# Altium PCB PCB2.PcbDoc
Units mm, origin at the board's own origin, x right, y up, seen from the top; angles counter-clockwise.
Board outline 21.46 x 22.68 mm, 2 copper layers (Top Layer, Bottom Layer), stack 0.88 mm thick; 17 components, 10 nets, 50 pads, 17 vias.
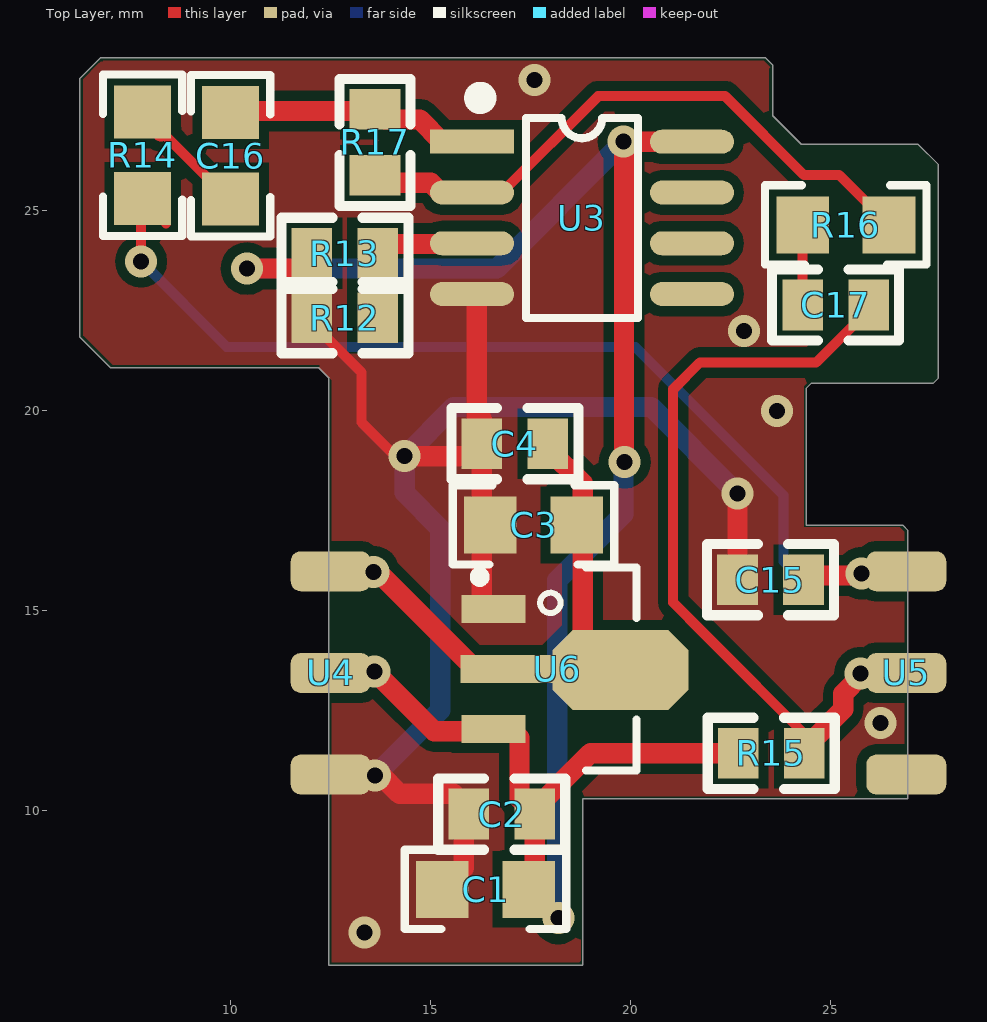
[diagram p0: Top Layer view]
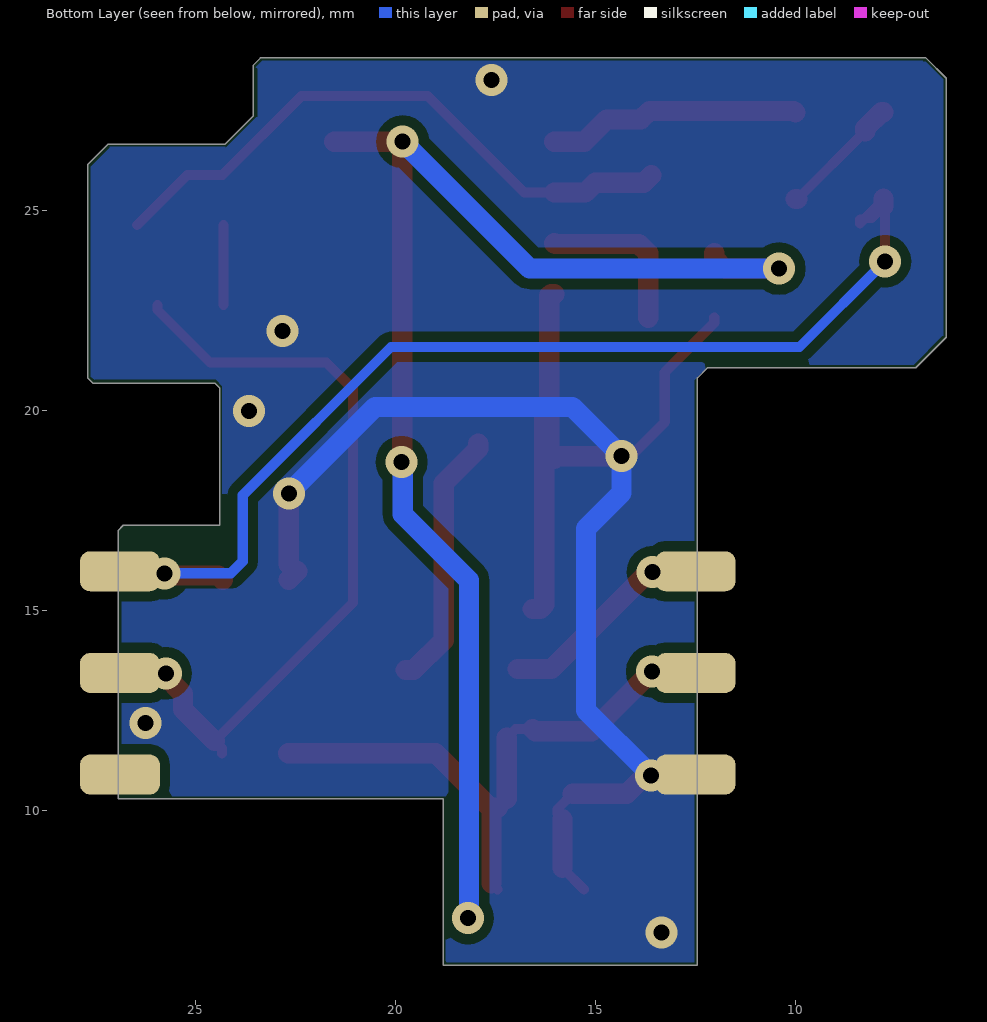
[diagram p1: Bottom Layer view, seen from below]
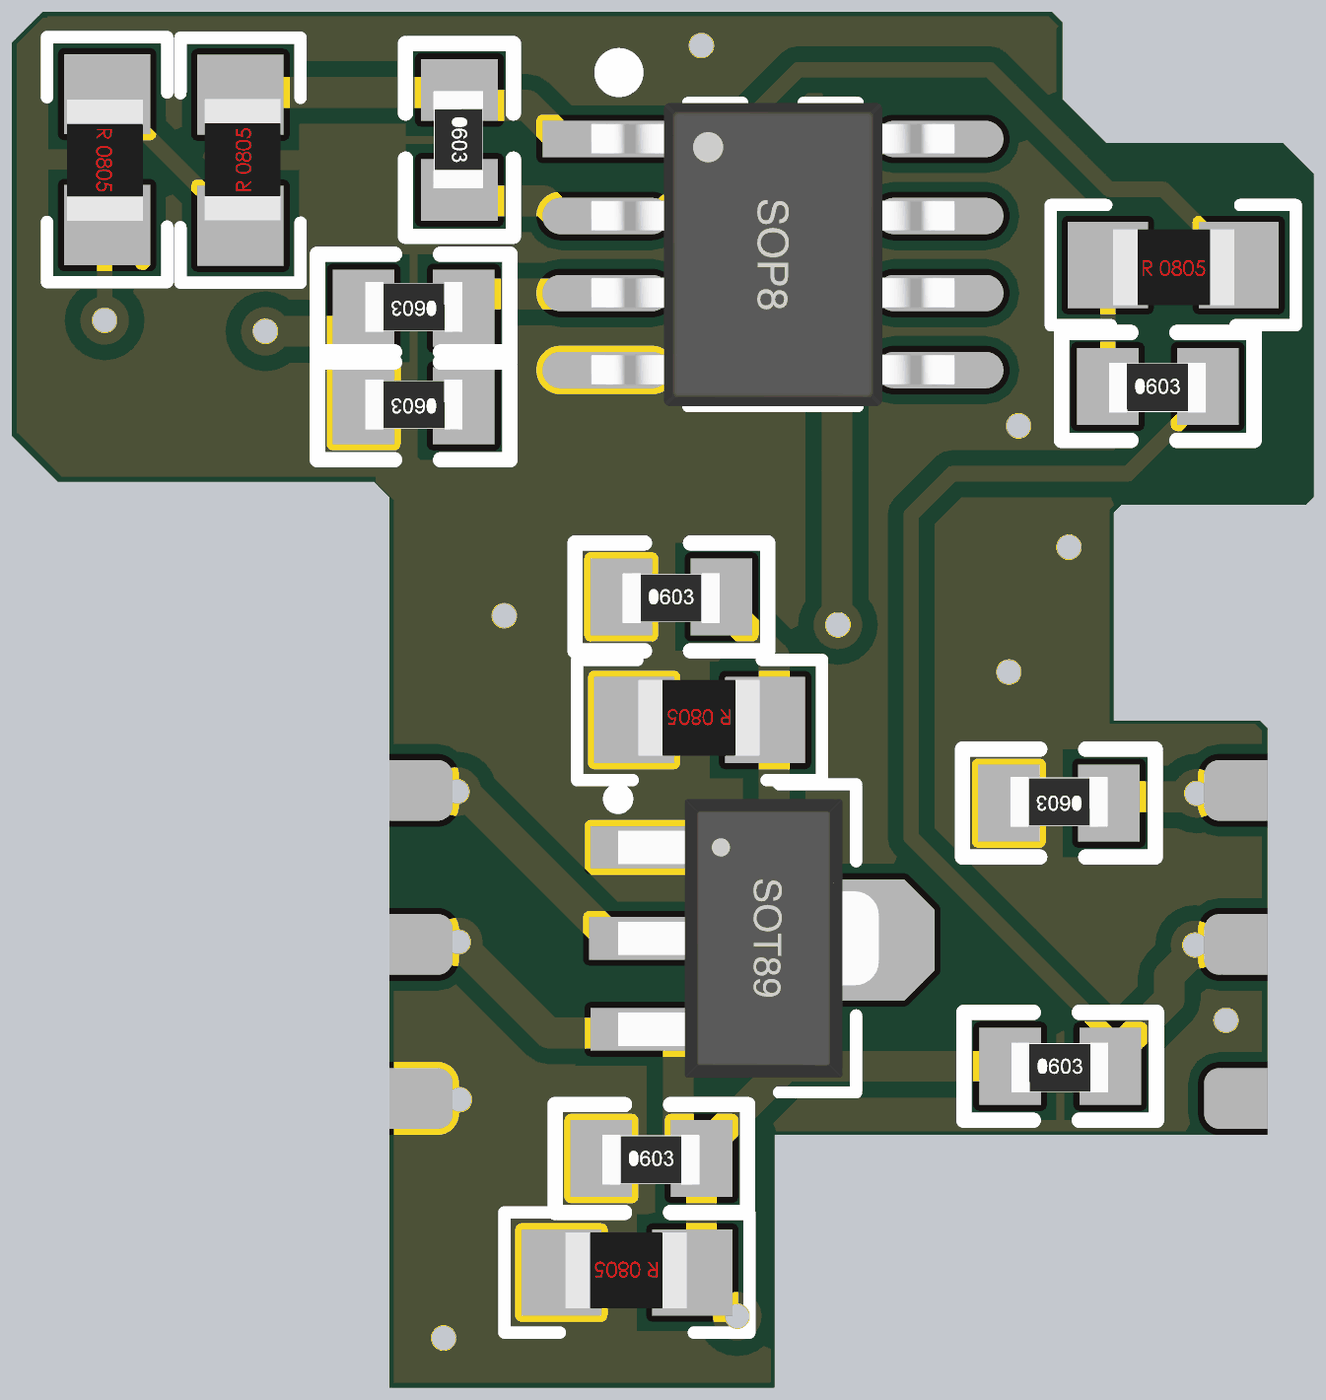
[diagram p2: 3D render of the assembled board from above, using the file's embedded part models]

## Layer stack, top to bottom
Top Solder: solder mask 0.0102, Solder Resist, Dk 3.5
Top Layer: signal copper 0.09
Dielectric 1: dielectric 0.7, FR-4, Dk 4.8
Bottom Layer: signal copper 0.09
Bottom Solder: solder mask 0.0102, Solder Resist, Dk 3.5

## Board outline
12.454,6.143 12.454,20.824 12.2,21.078 6.993,21.078 6.231,21.84 6.231,28.317 6.739,28.825 23.376,28.825 23.554,28.647 23.554,27.377 24.265,26.666 27.186,26.666 27.694,26.158 27.694,20.824 27.567,20.697 24.519,20.697 24.392,20.57 24.392,17.141 26.805,17.141 26.932,17.014 26.932,10.308 18.804,10.308 18.804,6.143

## Design rules (kind name [scope] priority, off if disabled: settings)
Clearance [All] p1: gap=0.254 ignorepadtopadclearanceinfootprint=FALSE except(0: Arc-Hole Track-Hole SMDPad-Hole THPad-Hole Via-Hole Fill-Hole Poly-Hole Region-Hole Text-Hole)
PolygonConnect [All] p1: thpad.connectstyle=Relief thpad.reliefconductorwidth=0.254 thpad.reliefentries=4 thpad.polygonreliefangle="90 Angle" thpad.airgapwidth=0.254 smdpad.connectstyle=Direct smdpad.reliefconductorwidth=0.254 smdpad.reliefentries=4 smdpad.polygonreliefangle="90 Angle" smdpad.airgapwidth=0.254 via.connectstyle=Direct via.reliefconductorwidth=0.254 via.reliefentries=4 via.polygonreliefangle="90 Angle" via.airgapwidth=0.254
RoutingVias [All] p1: holewidth=0.711 width=1.27 viastyle="Through Hole" minholewidth=0.3 minwidth=0.8 maxholewidth=0.711 maxwidth=1.27
SolderMaskExpansion [All] p1: expansion=0.102
Width [All] p1: maxlimit=1.27 minlimit=0.254 preferedwidth=0.254
30 further rules are at their usual default settings.

## Components (designator, comment, footprint, x,y, rotation, side; value= is the part's Value field where it differs from the comment)
C1 "10uF" RC0805 17.45,8.04 r180 top
C2 "104" RC0603 15.95,9.92 r0 top
C3 "10uF" RC0805 18.65,17.15 r180 top
C4 "104" RC0603 16.279,19.18 r0 top
C15 "104" RC0603 24.32,15.78 r180 top
C16 "4.7uf" RC0805 10,25.3 r90 top
C17 "104" RC0603 24.299,22.65 r0 top
R12 "10K" RC0603 13.681,22.33 r180 top
R13 "10K" RC0603 13.681,23.94 r180 top
R14 "300" RC0805 7.8,27.47 r270 top
R15 "10K" RC0603 22.69,11.44 r0 top
R16 "1K" RC0805 24.301,24.65 r0 top
R17 "50K" RC0603 13.61,27.54 r270 top
U3 "LM358" SOP8_M 18.78,24.825 r0 top
U4 "BOARD1" BOARD1 12.51,12.42 r0 top
U5 "BOARD2" BOARD2 15.64,12.37 r0 top
U6 "AMS1117-3.3" SOT89_M 18.626,13.55 r270 top

## Footprints (in the part's own frame and the unit in brackets; to place one, negate y for a bottom-side part, rotate by r counter-clockwise, add the part's x,y. Pads: shape width x height; smd on the part's side, far side on the other; paste and mask are expansions set on the pad)
BOARD1 [mm]
  rrect50% 2x1 smd: 1(-0.01,3.57) 2(-0.01,1.03) 3(-0.01,-1.51)
  rrect50% 2x1 smd far side: 1(-0.01,3.57) 2(-0.01,1.03) 3(-0.01,-1.51)
BOARD2 [mm]
  rrect50% 2x1 smd: 4(11.25,-1.46) 5(11.25,1.08) 6(11.25,3.62)
  rrect50% 2x1 smd far side: 4(11.25,-1.46) 5(11.25,1.08) 6(11.25,3.62)
RC0603 [mil]
  rect 40x50 smd: 1(0,0) 2(65,0)
  silkscreen extent -30,-35 95,35, body extent 1,-17 64,15, height 18
RC0805 [mil]
  rect 52x56 smd: 1(0,0) 2(85,0)
  silkscreen extent -37,-39 122,39, body extent 4,-26 82,23, height 16
SOP8_M [mm] "5*6*1.8mm（长宽高）"
  rect 2.1x0.6 smd: 1(-2.75,1.905)
  oval 2.1x0.6 smd: 2(-2.75,0.635) 3(-2.75,-0.635) 4(-2.75,-1.905) 5(2.75,-1.905) 6(2.75,-0.635) 7(2.75,0.635) 8(2.75,1.905)
  silkscreen extent -2.69,-2.5 1.4,3.15, body extent -3,-2.5 3,2.5, height 1.9
SOT89_M [mm] "4.6x4.3x1.6mm(长宽高)"
  rect 0.7x1.6 smd: 1(-1.5,-2.054) 3(1.5,-2.054)
  rect 0.7x2.4 smd: 2(0,-1.676)
  oct 2x3.4 smd: 2(0.025,1.118)
  silkscreen extent -2.54,-2.52 2.54,1.52, body extent -2.3,-2.4 2.3,1.9, height 1.6

## Part data
C1 C3: library part Cap2, "Capacitor", PackageDescription="Capacitor; 2 Leads", PackageReference=CAPR5-4X5, Published=23-Sep-2002, Publisher="Altium Limited"
C2 C4 C15 C16 C17: library part Cap, "Capacitor", LatestRevisionDate=17-Jul-2002, LatestRevisionNote="Re-released for DXP Platform.", PackageDescription="Radial Cap, Thru-Hole; 2 Leads; 0.3 in Pin Spacing", PackageReference=RAD-0.3, Published=8-Jun-2000, Publisher="Altium Limited"
R12 R13 R14 R15 R16 R17: library part Res2, "Resistor", LatestRevisionDate=17-Jul-2002, LatestRevisionNote="Re-released for DXP Platform.", PackageDescription="Axial Device, Thru-Hole; 2 Leads; 0.4 in Pin Spacing", PackageReference=AXIAL-0.4, Published=8-Jun-2000, Publisher="Altium Limited"
U3: "音频放大"
U6: "5V稳3.3V"

## Via types
v1: diameter 0.8, hole 0.4, Top Layer to Bottom Layer, tented both sides, 17 vias

## Nets (pads, with @x,y where several pads share a name; then routed paths per layer and width w, separated by ;. In a path a pad name is that pad's centre, name@x,y a point inside that pad or via, vN(x,y) a via of type N, cw(c..) or ccw(c..) an arc to the next point about the centre after c; other vN are vias at no path point)
3V3: C3.1 C4.2 U4.1 U6.2 | length 10.9
  Top Layer w0.508: v1(13.57,15.97) 13.626,15.914 13.736,15.914 16.1,13.55 U6.2@16.95,13.55 ; C4.2 17.93,19.053 18.783,18.2 18.798,18.2 18.798,14.271 19.544,13.525 U6.2@19.744,13.525
5V: C1.1 C2.2 R13.2 R15.1 U3.8 U4.2 U6.3 | length 48.6
  Top Layer w0.254: U6.3 16.997,12.05 U6.3@17.22,11.827 ; C2.2@17.22,10.301 17.441,10.081 C2.2 ; C1.1 C1.1@17.601,8.191
  Top Layer w0.508: v1(10.411,23.559) 11.776,23.559 12.03,23.813 R13.2 ; v1(13.59,13.49) 15.09,11.99 16.512,11.99 U6.3 ; C2.2@17.22,10.301 U6.3@17.22,11.827 ; C2.2@17.441,10.081 17.635,10.081 18.994,11.44 R15.1 ; C1.1@17.601,8.191 C2.2 ; v1(19.85,18.72) 19.835,18.735 19.835,26.715 v1(19.82,26.73) U3.8
  Bottom Layer w0.508: v1(10.411,23.559) 16.649,23.559 v1(19.82,26.73) ; v1(18.19,7.32) 18.165,7.345 18.165,15.765 19.82,17.42 19.82,18.69 v1(19.85,18.72)
GND: C1.2 C2.1 C3.2 C4.1 C15.2 R12.2 U3.4 U4.3 U6.1 | length 41.7
  Top Layer w0.254: R12.2 12.03,22.203 13.27,20.963 13.27,19.72 14.12,18.87 v1(14.35,18.87) ; v1(13.61,10.89) v1@13.758,10.89 ; C1.2 C1.2@15.824,8.573 ; C2.1@15.569,10.428 15.95,10.047 C2.1 C2.1@15.824,9.794
  Top Layer w0.508: v1@13.758,10.89 14.22,10.428 C2.1@15.569,10.428 ; v1(14.35,18.87) C4.1@16.096,18.87 ; C1.2@15.824,8.573 C2.1@15.824,9.794 ; C4.1@16.025,18.799 C4.1@16.096,18.87 ; U3.4 16.112,22.92 16.155,22.878 16.155,18.929 C4.1@16.096,18.87 ; C4.1@16.155,18.87 C4.1@16.096,18.87 ; C4.1@16.279,19.789 C4.1 16.279,15.146 16.375,15.05 U6.1 ; C15.2 22.46,15.989 22.497,15.989 22.669,16.161 v1(22.669,17.941)
  Bottom Layer w0.508: v1(13.61,10.89) 15.24,12.52 15.24,17.06 14.35,17.95 v1(14.35,18.87) 15.58,20.1 20.51,20.1 v1(22.669,17.941)
  other v1: 13.35,6.96 26.25,12.2 23.66,20 22.83,22 17.6,28.27
MIC+: C17.2 R15.2 U5.5 | length 18.4
  Top Layer w0.254: R15.2 R15.2@24.341,11.567 ; R15.2@24.522,11.748 21.825,14.445 21.06,15.21 21.06,20.54 21.73,21.21 24.637,21.21 25.95,22.523 C17.2
  Top Layer w0.508: R15.2@24.522,11.748 25.313,12.539 25.313,12.934 25.74,13.361 v1(25.74,13.44)
NetC16_1: C16.1 R14.1 | length 3.1
  Top Layer w0.254: R14.1@8.257,26.992 C16.1@9.949,25.3
  Top Layer w0.508: R14.1 7.851,27.47 8.257,27.064 R14.1@8.257,26.992 ; C16.1@9.949,25.3 C16.1
NetC16_2: C16.2 R17.1 U3.1 | length 6.4
  Top Layer w0.508: C16.2 10.041,27.499 13.651,27.499 13.864,27.286 14.724,27.286 15.28,26.73 U3.1
NetC17_1: C17.1 R16.1 | length 2
  Top Layer w0.254: C17.1 24.299,24.648 R16.1
NetR12_1: R12.1 R13.1 U3.3 | length 4.1
  Top Layer w0.508: R12.1 R13.1 13.913,24.172 16.012,24.172 U3.3
NetR16_2: R16.2 R17.2 U3.2 | length 15.4
  Top Layer w0.254: U3.2 16.78,25.46 19.19,27.87 22.36,27.87 24.33,25.9 25.21,25.9 R16.2
  Top Layer w0.508: R17.2 13.791,25.708 15.007,25.708 15.255,25.46 U3.2
PA1: C15.1 R14.2 U5.6 | length 27
  Top Layer w0.254: v1(7.76,23.74) 7.76,25.278 7.78,25.298 7.8,25.278 R14.2@8.248,24.83 ; R14.2@7.8,25.12 8.09,24.83 R14.2@8.248,24.83 ; R14.2@8.384,24.693 8.384,24.778 8.3,24.778 R14.2@8.248,24.83
  Top Layer w0.508: R14.2@7.8,25.12 7.8,25.278 R14.2 ; C15.1 24.424,15.884 25.714,15.884 v1(25.77,15.94)
  Bottom Layer w0.254: v1(7.76,23.74) 9.9,21.6 20.115,21.6 23.82,17.894 23.82,16.24 24.12,15.94 v1(25.77,15.94)
pads on no net: U3.5 U3.6 U3.7 U5.4

## Polygon pours and split planes (outlines as drawn)
GND on Top Layer "GND_L01_P000" (solid, remove dead copper, pour order 0): 6.81,28.73 6.75,28.73 6.31,28.29 6.31,21.88 6.33,21.88 7.05,21.16 12.23,21.16 12.23,21.07 12.53,20.77 12.53,6.22 18.72,6.22 18.75,6.25 18.75,10.37 26.82,10.37 26.84,10.39 26.84,16.98 26.73,17.09 24.33,17.09 24.33,20.62 24.5,20.79 27.51,20.79 27.54,20.76 27.62,20.84 27.62,26.1 27.14,26.58 27.14,26.6 24.26,26.6 24.24,26.58 23.48,27.34 23.45,27.34 23.45,28.55 23.49,28.59 23.33,28.75 6.76,28.75
GND on Bottom Layer "GND_L02_P002" (solid, remove dead copper, pour order 2): 6.81,28.73 6.75,28.73 6.31,28.29 6.31,21.88 6.33,21.88 7.05,21.16 12.23,21.16 12.23,21.07 12.53,20.77 12.53,6.22 18.72,6.22 18.75,6.25 18.75,10.37 26.82,10.37 26.84,10.39 26.84,16.98 26.73,17.09 24.33,17.09 24.33,20.62 24.5,20.79 27.51,20.79 27.54,20.76 27.62,20.84 27.62,26.1 27.14,26.58 27.14,26.6 24.26,26.6 24.24,26.58 23.48,27.34 23.45,27.34 23.45,28.55 23.49,28.59 23.33,28.75 6.76,28.75

## Silkscreen, mask and mechanical layers (free items; w line width, h text height)
Mechanical 1:
  lines w0.127: 6.229,21.855 6.991,21.093 12.198,21.093 12.452,20.839 12.452,16.013 12.452,6.157 18.802,6.157 18.802,10.323 26.93,10.323 26.93,17.029 26.803,17.156 24.39,17.156 24.39,20.585 24.517,20.712 27.565,20.712 27.692,20.839 27.692,26.173 27.184,26.681 24.263,26.681 23.552,27.392 23.552,28.662 23.374,28.84 6.737,28.84 6.229,28.332 6.229,21.855